# Altium PCB 2009_DFMUX_MEZZANINE_REV4_TIMEMAIL.PCBDOC (part 5 of 6)
Units mil, origin at the board's own origin, x right, y up, seen from the top; angles counter-clockwise.
Board outline 4922.86 x 3627.76 mil, 6 copper layers (Top Layer, Internal Plane 1, Mid-Layer 1, Internal Plane 2, Mid-Layer 2, Bottom Layer); 519 components, 606 nets, 2175 pads, 757 vias.
Unrouted connection lines stored in the file: 148.
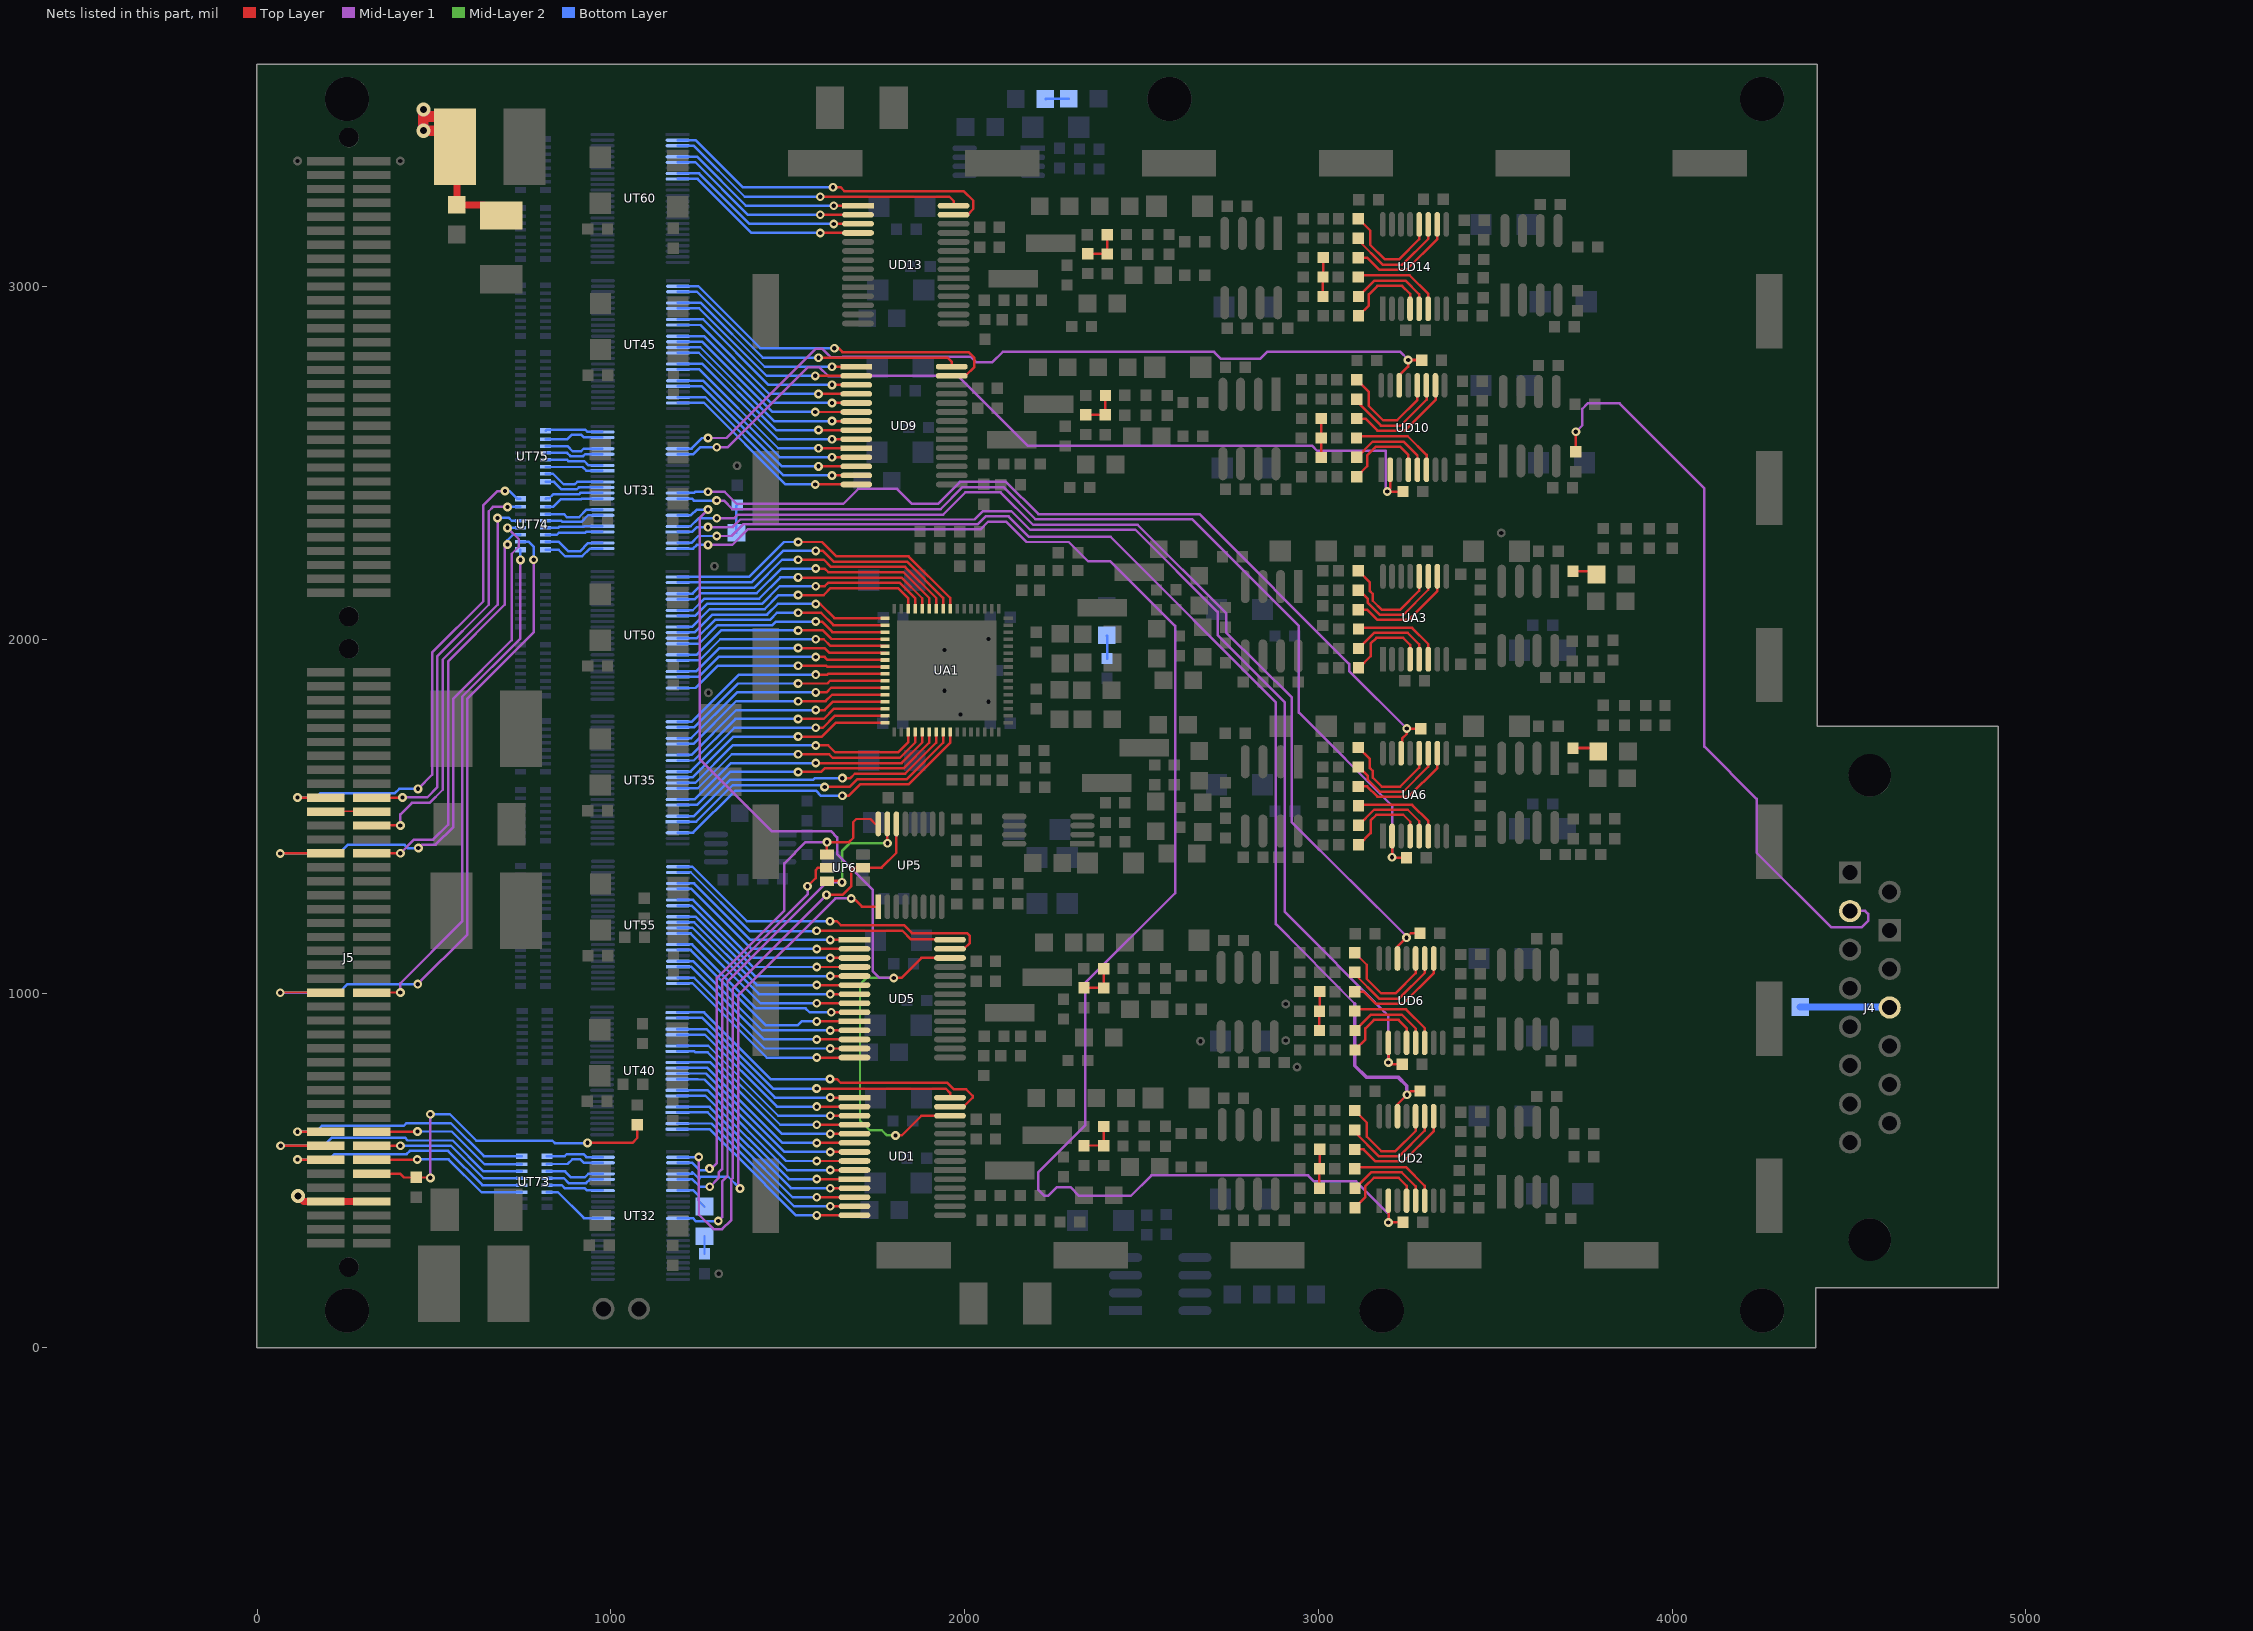
[diagram p9: the nets of this part, all layers, seen from the top]

## Via types
v1: diameter 25, hole 12, Top Layer to Bottom Layer, 692 vias
v2: diameter 40, hole 20, Top Layer to Bottom Layer, 39 vias
v3: diameter 35, hole 20, Top Layer to Bottom Layer, 23 vias
v4: diameter 22, hole 12, Top Layer to Bottom Layer, 3 vias

## Nets (pads, with @x,y where several pads share a name; then routed paths per layer and width w, separated by ;. In a path a pad name is that pad's centre, name@x,y a point inside that pad or via, vN(x,y) a via of type N, cw(c..) or ccw(c..) an arc to the next point about the centre after c; other vN are vias at no path point) (continued)
N867949: J5.19 UT74.16 | length 1439.7
  Top Layer w7: v1(114.33,1554.07) J5.19@194.63,1554.07
  Mid-Layer 1 w7: v1(454.63,1578.57) 494.63,1618.57 494.63,1964 639.63,2109 639.63,2381 679,2420.37 v1(700.63,2420.37)
  Bottom Layer w7: v1(114.33,1554.07) 166.13,1554.07 178.63,1566.57 389.63,1566.57 401.63,1578.57 v1(454.63,1578.57) ; v1(700.63,2420.37) 713.63,2420.37 735.63,2398.37 UT74.16@744.13,2398.37
N869068: J5.20 UT74.15 | length 1132.4
  Top Layer w7: J5.20@324.55,1554.07 410.93,1554.07 v1(410.63,1554.37)
  Mid-Layer 1 w7: v1(410.63,1554.37) 411.1,1554.83 481.1,1554.83 509.63,1583.37 509.63,1954 654.63,2099 654.63,2363.37 666.63,2375.37 v1(707.63,2375.37)
  Bottom Layer w7: v1(707.63,2375.37) UT74.15@744.13,2375.37
N870193: RA31.2 UA6.14 UT31.13 | length 2553
  Top Layer w7: UA6.14@3233.82,1679.68 3236.63,1682.5 3236.63,1721 3249.63,1734 v1(3249.63,1749) RA31.2@3288.63,1749
  Mid-Layer 1 w7: v1(1274.27,2418.37) 1321.27,2418.37 1355.63,2384 1656.86,2384 1699.27,2426.41 1809.27,2426.41 1851.68,2384 1924.36,2384 1986.77,2446.41 2116.77,2446.41 2208.18,2355 2663.63,2355 3086.63,1932 3086.63,1912 v1(3249.63,1749)
  Bottom Layer w7: UT31.13@1188.63,2414.97 1235.53,2414.97 1239.13,2418.37 v1(1274.27,2418.37)
N871887: RA55.2 UA6.2 UT31.14 | length 2821.3
  Top Layer w7: UA6.2@3208.23,1445.43 v1(3208.23,1385.4) 3209.63,1384 RA55.2@3248.63,1384
  Mid-Layer 1 w7: v1(1299,2393.37) 1319.27,2393.37 1343.63,2369 1931.86,2369 1994.27,2431.41 2109.27,2431.41 2199.68,2341 2643,2341 2945,2039.37 2945,1794 3208.63,1530 3208.63,1385.8 v1(3208.23,1385.4)
  Bottom Layer w7: UT31.14@1188.63,2399.27 1228.73,2399.27 1234.63,2393.37 v1(1299,2393.37)
N888717: UD1.26 UD5.26 UT31.17 | length 2741.6
  Top Layer w7: v1(1799.63,1044) 1821.27,1044 1877.9,1100.63 UD5.26@1959.03,1100.63 ; v1(1804.63,599) 1822.27,599 1877.9,654.63 UD1.26@1959.03,654.63
  Mid-Layer 1 w7: v1(1274.63,2368) 1250.63,2344 1250.63,1662.55 1454.27,1458.91 1621.77,1458.91 1639.27,1441.41 1639.27,1394.36 1739.63,1294 1739.63,1064 1759.27,1044 v1(1799.63,1044)
  Mid-Layer 2 w7: v1(1799.63,1044) 1722.25,1044 1704.13,1025.88 1704.13,640.5 1731.63,613.5 1765.5,613.5 1780,599 v1(1804.63,599)
  Bottom Layer w7: UT31.17@1188.63,2352.17 1226.3,2352.17 1242.93,2368 v1(1274.63,2368)
N890448: J5.24 UT74.13 | length 1160.3
  Top Layer w7: J5.24@324.55,1475.33 v1(404.85,1475.33)
  Mid-Layer 1 w7: v1(404.85,1475.33) 404.85,1506.22 437.63,1539 487.63,1539 524.63,1576 524.63,1944 679.63,2099 v1(679.63,2344.37)
  Bottom Layer w7: v1(679.63,2344.37) 711.63,2344.37 719.63,2336.37 UT74.13@744.13,2336.37
N891610: RD31.2 UD6.14 UT31.19 | length 2972.9
  Top Layer w7: UD6.14@3223.8,1099.02 3223.8,1133.17 v1(3248.63,1158) 3261.07,1170.43 RD31.2@3286.63,1170.43
  Mid-Layer 1 w7: v1(1299.27,2343.37) 1348,2343.37 1358.63,2354 1939.36,2354 2001.77,2416.41 2101.77,2416.41 2193.18,2325 2488.63,2325 2739.63,2074 2739.63,2019.37 2925,1836.37 2925,1484 3248.63,1162 v1(3248.63,1158)
  Bottom Layer w7: UT31.19@1188.63,2320.77 1225.4,2320.77 1248,2343.37 v1(1299.27,2343.37)
N892778: RD59.2 UD6.2 UT31.20 | length 3239
  Top Layer w7: v1(3197.63,805) v1@3198.23,804.4 ; UD6.2@3198.23,860.43 v1@3198.23,804.4 ; RD59.2@3236.63,800.43 3202.2,800.43 v1@3198.23,804.4
  Mid-Layer 1 w7: v1(1274.27,2318.37) 1344,2318.37 1365.63,2340 2027.86,2340 2051.77,2363.91 2131.77,2363.91 2184.68,2311 2482.63,2311 2715,2078.63 2715,2014 2905,1822.37 2905,1231 3197.63,936 3197.63,807 3196.63,806 v1(3197.63,805)
  Bottom Layer w7: UT31.20@1188.63,2305.07 1229.7,2305.07 1243,2318.37 v1(1274.27,2318.37)
N895125: RD1.2 UD2.14 UT31.22 | length 3382.3
  Top Layer w7: UD2.14@3223.8,653.02 3223.8,687.17 v1(3250.63,714) ; RD1.2@3286.63,724.43 3261.07,724.43 ; v1(3250.63,714) 3261.07,724.43 ; v1(3250.63,714) 3261.07,724.43
  Mid-Layer 1 w7: v1(1299.27,2293.37) 1341,2293.37 1373.63,2326 2036.36,2326 2059.27,2348.91 2124.27,2348.91 2182.18,2291 2413,2291 2880,1822.37 2880,1196.23 3102.63,971.23
  Mid-Layer 1 w10: 3102.63,971.23 3102.63,796.37 3135,764 3225,764 3250,739 3250,714.63 v1(3250.63,714)
  Bottom Layer w7: UT31.22@1188.63,2273.67 1227.53,2273.67 1246.83,2293.37 v1(1299.27,2293.37)
N896305: RD29.2 UD2.2 UT31.23 | length 4530.2
  Top Layer w7: v1(3197.63,353) 3198.03,352.6 v1@3198.23,352.6 ; UD2.2@3198.23,414.43 v1@3198.23,352.6 ; RD29.2@3238.63,355 3238.63,354 3199.63,354 v1@3198.23,352.6
  Mid-Layer 1 w7: v1(1274.27,2268.37) 1343,2268.37 1386.63,2312 2044.86,2312 2066.77,2333.91 2116.77,2333.91 2174.27,2276.41 2294.36,2276.41 2349.27,2221.5 2412.13,2221.5 2594.63,2039 2594.63,1283.63 2340.63,1029.63 2340.63,627 2207.63,494 2207.63,446 2225.63,428 2235.63,428 2260.63,453 2298.63,453 2323.63,428 2469.63,428 2527.63,486 2970.63,486 2987.63,469 3106.63,469 3198.63,377 3198.63,354 v1(3197.63,353)
  Bottom Layer w7: UT31.23@1188.63,2257.97 1232.6,2257.97 1243,2268.37 v1(1274.27,2268.37)
N906454: J5.27 UT74.12 | length 1628.9
  Top Layer w7: v1(65.55,1395.83) 66.32,1396.6 J5.27@194.63,1396.6
  Mid-Layer 1 w7: v1(455.73,1411.27) 455.9,1411.27 465.63,1421 504.63,1421 554.63,1471 554.63,1834 719.63,1999 719.63,2243.13 739.63,2262.93 739.63,2284.37 v1(707.63,2316.37)
  Bottom Layer w7: v1(65.55,1395.83) 231.2,1395.83 255.63,1420.27 416.63,1420.27 425.63,1411.27 v1(455.73,1411.27) ; v1(707.63,2316.37) UT74.12@744.13,2316.37
N908856: J5.28 UT74.11 | length 1165.1
  Top Layer w7: J5.28@324.55,1396.6 v1(404.85,1396.6)
  Mid-Layer 1 w7: v1(404.85,1396.6) 443.25,1435 497.63,1435 539.63,1477 539.63,1939 699.63,2099 699.63,2261.37 v1(707.63,2269.37)
  Bottom Layer w7: v1(707.63,2269.37) 707.63,2281.37 722.63,2296.37 UT74.11@744.13,2296.37
N958957: J5.47 UT74.10 | length 1943.7
  Top Layer w7: v1(65.55,1002.17) 66.32,1002.93 J5.47@194.63,1002.93
  Mid-Layer 1 w7: v1(453.87,1026.6) 594.63,1167.37 594.63,1834 781.63,2021 v1(781.63,2226.37)
  Bottom Layer w7: v1(65.55,1002.17) 231.2,1002.17 255.63,1026.6 v1(453.87,1026.6) ; UT74.10@744.13,2277.37 767.63,2277.37 781.63,2263.37 v1(781.63,2226.37)
N960349: J5.48 UT74.9 | length 1472.3
  Top Layer w7: J5.48@324.55,1002.93 v1(404.85,1002.93)
  Mid-Layer 1 w7: v1(404.85,1002.93) 404.85,1029.22 579.63,1204 579.63,1839 744.13,2003.5 v1(744.13,2225.87)
  Bottom Layer w7: v1(744.13,2225.87) UT74.9@744.13,2254.37
N995552: J5.74 RP1.1 RP4.1 | length 1012.3
  Top Layer w7: J5.74@324.55,491.17 403.47,491.17 414.63,480 449.63,480 488.63,480 v1(489.63,479) ; v1(933.63,578) 1060.63,578 1074.63,592 RP1.1@1074.63,629
  Mid-Layer 1 w7: v1(489.63,479) v1(489.63,659)
  Bottom Layer w7: v1(489.63,659) 544.63,659 619.63,584 834.63,584 841.63,577 932.63,577 v1(933.63,578)
N1002964: CP12.1 J5.77 J5.78 LP3.1 RP13.1 | length 738.8
  Top Layer w7: LP3.1@559.63,3394 LP3.1@564.63,3389 ; CP12.1@640.63,3229 671.63,3198 688.63,3198 CP12.1@689.63,3199
  Top Layer w10: LP3.1@514.63,3439 LP3.1@559.63,3394
  Top Layer w20: v2(115.7,427.82) 131.08,412.43 194.63,412.43 J5.78@324.55,412.43 ; LP3.1@564.63,3389 564.63,3229 CP12.1@640.63,3229
  Top Layer w30: v2(470,3499) 470,3479 ; LP3.1@514.63,3439 v2(470,3439) 470,3479 ; LP3.1@520,3479 470,3479
N1115828: UP5.15 UP6.6 UT32.13 | length 1573.1
  Top Layer w7: UP6.6@1610.67,1318.37 1649.63,1318.37 v1(1653.63,1314.37) ; UP5.15@1781.52,1480.05 1781.52,1424.48 1781.63,1424.37 v1(1781.63,1425)
  Mid-Layer 1 w7: v1(1303.63,357) 1314.63,368 1314.63,469 1329.63,484 1329.63,1034 1610.63,1315 1652.63,1315 1653.63,1314 v1(1653.63,1314.37)
  Mid-Layer 2 w7: v1(1653.63,1314.37) 1653.63,1403.27 1675.36,1425 v1(1781.63,1425)
  Bottom Layer w7: UT32.13@1189.63,364.97 1231.67,364.97 1239.63,357 v1(1303.63,357)
N1144411: UT32.36 UT73.6 | length 188.3
  Bottom Layer w7: UT73.6@819.13,438.37 850.27,438.37 923.67,364.97 UT32.36@977.03,364.97
N1162483: UT32.47 UT73.1 | length 163.7
  Bottom Layer w7: UT73.1@819.13,540.37 869.63,540.37 875.27,546 922.63,546 930.97,537.67 UT32.47@977.03,537.67
N1165605: UT32.46 UT73.2 | length 167.2
  Bottom Layer w7: UT73.2@819.13,517.37 877.63,518.37 890.63,531.37 913.63,531.37 923.03,521.97 UT32.46@977.03,521.97
N1167954: UT32.44 UT73.3 | length 169.2
  Bottom Layer w7: UT73.3@819.13,497.37 870.63,497.37 887.63,480.37 926,480.37 936.2,490.57 UT32.44@977.03,490.57
N1236272: CA46.2 RA13.2 | length 70.1
  Top Layer w7: RA13.2@3719.63,2194 3775.63,2194 CA46.2@3785.63,2184
N1241817: CA48.2 RA36.2 | length 75.1
  Top Layer w8: RA36.2@3719.63,1694 3780.63,1694 CA48.2@3790.63,1684
N1340990: J4.2 RD78.2 | length 2154.9
  Top Layer w7: RD78.2@3727.63,2531.43 v1(3727.63,2587.93)
  Mid-Layer 1 w7: v1(3727.63,2587.93) 3746.13,2606.43 3746.13,2652.93 3761.13,2667.93 3851.13,2667.93 4091.13,2427.93 4091.13,1697.93 4238.63,1550.43 4238.63,1397.93 4449,1187.57 4536.13,1187.57 4553.63,1205.07 4553.63,1225.07 4545.2,1233.5 J4.2@4502.5,1233.5
N1421104: RD61.2 UD10.14 UT31.5 | length 2397.7
  Top Layer w7: UD10.14@3228.8,2719.02 3226.63,2721.18 3226.63,2745.43 3253.63,2772.43 v1@3253.63,2790.43 ; v1@3253.63,2790.43 3291.63,2790.43 3291.07,2791 v1(3253.63,2791) v1@3253.63,2790.43
  Mid-Layer 1 w7: v1(1274.27,2570.37) 1327,2570.37 1579.63,2823 1596.63,2823 1620.63,2799 1654.63,2799 1655.63,2800 2016.63,2800 2031.63,2785 2078.63,2785 2107.63,2814 2705,2814 2725,2794 2835,2794 2855,2814 3231.63,2814 3252.63,2793 3252.63,2792 v1(3253.63,2791)
  Bottom Layer w7: UT31.5@1188.63,2540.57 1226.83,2540.57 1227.03,2540.37 1228,2540.37 1258,2570.37 v1(1274.27,2570.37)
N1428417: RD89.2 UD10.2 UT31.6 | length 2434.5
  Top Layer w7: UD10.2@3203.23,2480.43 3203.23,2427.6 v1(3194.63,2419) 3238.63,2419 3238.63,2420 RD89.2@3233.63,2420
  Mid-Layer 1 w7: v1(1299.27,2544.37) 1331,2544.37 1557.63,2771 1588.63,2771 1614.63,2745 1704.63,2745 1705.63,2746 1980.63,2746 2177.63,2549 2981.63,2549 2996.63,2534 3190.63,2534 3190.63,2423 v1(3194.63,2419)
  Bottom Layer w7: UT31.6@1188.63,2524.87 1233.1,2524.87 1253.1,2544.37 v1(1299.27,2544.37)
N2077430: DP1.2 RP8.1 | length 78.8
  Bottom Layer w7: DP1.2@1354.63,2303 1354.63,2379 RP8.1@1356.63,2381
N2078571: DP3.2 RP17.1 | length 67.4
  Bottom Layer w7: DP3.2@2228.63,3529 2228.63,3528 2229.63,3529 RP17.1@2294.63,3529
N2311501: UT32.43 UT73.4 | length 168
  Bottom Layer w7: UT73.4@819.13,478.37 866.63,478.37 880.63,464.37 930,464.37 940.5,474.87 UT32.43@977.03,474.87
N2314699: UT32.41 UT73.5 | length 164.1
  Bottom Layer w7: UT73.5@819.13,458.37 861,458.37 869.37,450 925.63,450 932.17,443.47 UT32.41@977.03,443.47
N2484141: J5.67 UT73.16 | length 763
  Top Layer w7: v1(114.33,609.27) J5.67@194.63,609.27
  Bottom Layer w7: v1(114.33,609.27) 166.13,609.27 182.63,626 414.58,626 422.53,633.77 547.37,633.77 640.77,540.37 UT73.16@748.13,540.37
N2488507: J5.68 UT73.15 | length 466.3
  Top Layer w7: J5.68@324.55,609.27 452.87,609.27 v1(453.63,610.03)
  Bottom Layer w7: v1@449.63,610.03 v1(453.63,610.03) 550.1,610.03 642.77,517.37 UT73.15@748.13,517.37
N2489600: J5.69 UT73.14 | length 858.9
  Top Layer w7: v1(66.55,569.9) J5.69@194.63,569.9
  Bottom Layer w7: v1(66.55,569.9) 188.77,569.9 212.2,593 417.63,593 425.63,584.57 553.07,584.57 640.27,497.37 UT73.14@748.13,497.37
N2492888: J5.71 UT73.12 | length 764.3
  Top Layer w7: v1(114.33,530.53) J5.71@194.63,530.53
  Bottom Layer w7: v1(114.33,530.53) 203.63,530.53 219.13,546 422.67,546 431.63,555.03 540.1,555.03 636.77,458.37 UT73.12@748.13,458.37
N2615723: J5.70 UT73.13 | length 464.2
  Top Layer w7: J5.70@324.55,569.9 v1(404.85,569.9) v1@406.17,569.9
  Bottom Layer w7: v1@403.85,568.9 v1(404.85,569.9) 547.73,569.9 639.27,478.37 UT73.13@748.13,478.37
N2902454: J5.72 UT73.11 | length 463
  Top Layer w7: J5.72@324.55,530.53 452.87,530.53 452.87,530.77 v1(452.63,531)
  Bottom Layer w7: v1(452.63,531) 452.93,531.3 541.33,531.3 634.27,438.37 UT73.11@748.13,438.37
N3312794: J4.12 RG1.2 | length 251.7
  Bottom Layer w20: RG1.2@4362,962 J4.12@4613.7,962
N3409536: J5.21 J5.22 | length 129.9
  Top Layer w4: J5.21@194.63,1514.7 J5.22@324.55,1514.7
N4032631: RA39.1 UA6.10 | length 311
  Top Layer w7: RA39.1@3112.63,1585.43 3137.63,1585.43 3166.63,1556.43 3254.63,1556.43 3336.18,1637.98 UA6.10@3336.18,1679.68
N4033590: RA26.2 UA3.6 | length 259.3
  Top Layer w7: RA26.2@3113.63,2030.43 3116.63,2033.43 3264.63,2033.43 3310.63,1987.43 UA3.6@3310.63,1945.43
N4033750: RA45.2 UA6.5 | length 244.6
  Top Layer w7: RA45.2@3113.63,1475.43 3157.63,1519.43 3252.63,1519.43 3285.03,1487.03 UA6.5@3285.03,1445.43
N4034511: RA14.1 UA3.10 | length 311
  Top Layer w7: RA14.1@3112.63,2085.43 3137.63,2085.43 3166.63,2056.43 3254.63,2056.43 3336.18,2137.98 UA3.10@3336.18,2179.68
N4034991: RA38.1 UA6.11 | length 301.1
  Top Layer w7: RA38.1@3112.63,1640.43 3114.63,1640.43 3139.63,1615.43 3139.63,1604.43 3173.63,1570.43 3239.63,1570.43 3310.58,1641.38 UA6.11@3310.58,1679.68
N4037191: RA16.1 UA3.11 | length 301.1
  Top Layer w7: RA16.1@3112.63,2140.43 3114.63,2140.43 3139.63,2115.43 3139.63,2104.43 3173.63,2070.43 3239.63,2070.43 3310.58,2141.38 UA3.11@3310.58,2179.68
N4040194: RA24.2 UA3.4 | length 250.5
  Top Layer w7: RA24.2@3113.63,1920.43 3114.63,1920.43 3147.63,1953.43 3147.63,1989.43 3163.63,2005.43 3239.63,2005.43 3259.43,1985.63 UA3.4@3259.43,1945.43
N4040195: RA25.2 UA3.5 | length 244.6
  Top Layer w7: RA25.2@3113.63,1975.43 3157.63,2019.43 3252.63,2019.43 3285.03,1987.03 UA3.5@3285.03,1945.43
N4040351: RA37.1 UA6.12 | length 307.5
  Top Layer w7: RA37.1@3112.63,1695.43 3145.63,1662.43 3145.63,1637.43 3153.63,1629.43 3153.63,1610.43 3179.63,1584.43 3230.63,1584.43 3285,1638.8 UA6.12@3285,1679.68
N4043354: RA50.2 UA6.4 | length 250.5
  Top Layer w7: RA50.2@3113.63,1420.43 3114.63,1420.43 3147.63,1453.43 3147.63,1489.43 3163.63,1505.43 3239.63,1505.43 3259.43,1485.63 UA6.4@3259.43,1445.43
N4043356: RA48.2 UA6.6 | length 259.3
  Top Layer w7: RA48.2@3113.63,1530.43 3116.63,1533.43 3264.63,1533.43 3310.63,1487.43 UA6.6@3310.63,1445.43
N5320690: RD114.2 UD14.6 | length 264
  Top Layer w7: RD114.2@3112.63,3025.43 3117.63,3030.43 3257.63,3030.43 3310.63,2977.43 UD14.6@3310.63,2935.43
N5320690_5462: RD84.2 UD10.6 | length 264
  Top Layer w7: RD84.2@3107.63,2570.43 3112.63,2575.43 3252.63,2575.43 3305.63,2522.43 UD10.6@3305.63,2480.43
N5320690_5910: RD54.2 UD6.6 | length 264
  Top Layer w7: RD54.2@3102.63,950.43 3107.63,955.43 3247.63,955.43 3300.63,902.43 UD6.6@3300.63,860.43
N5320690_6358: RD24.2 UD2.6 | length 264
  Top Layer w7: RD24.2@3102.63,504.43 3107.63,509.43 3247.63,509.43 3300.63,456.43 UD2.6@3300.63,414.43
N5321451: RD102.2 RD105.1 RD107.1 | length 110.4
  Top Layer w7: RD107.1@3012.63,2970.43 3012.63,3025.43 3013.63,3026.43 RD102.2@3013.63,3080.43
N5321451_5458: RD72.2 RD75.1 RD77.1 | length 110.4
  Top Layer w7: RD77.1@3007.63,2515.43 3007.63,2570.43 3008.63,2571.43 RD72.2@3008.63,2625.43
N5321451_5906: RD42.2 RD45.1 RD47.1 | length 110.4
  Top Layer w7: RD47.1@3002.63,895.43 3002.63,950.43 3003.63,951.43 RD42.2@3003.63,1005.43
N5321451_6354: RD12.2 RD15.1 RD17.1 | length 110.4
  Top Layer w7: RD17.1@3002.63,449.43 3002.63,504.43 3003.63,505.43 RD12.2@3003.63,559.43
N5321931: RD97.1 UD14.10 | length 314.5
  Top Layer w7: RD97.1@3112.63,3080.43 3137.63,3080.43 3171.63,3046.43 3249.63,3046.43 3336.13,3132.93 UD14.10@3336.13,3174.02
N5321931_5455: RD67.1 UD10.10 | length 314.5
  Top Layer w7: RD67.1@3107.63,2625.43 3132.63,2625.43 3166.63,2591.43 3244.63,2591.43 3331.13,2677.93 UD10.10@3331.13,2719.02
N5321931_5903: RD37.1 UD6.10 | length 314.5
  Top Layer w7: RD37.1@3102.63,1005.43 3127.63,1005.43 3161.63,971.43 3239.63,971.43 3326.13,1057.93 UD6.10@3326.13,1099.02
N5321931_6351: RD7.1 UD2.10 | length 314.5
  Top Layer w7: RD7.1@3102.63,559.43 3127.63,559.43 3161.63,525.43 3239.63,525.43 3326.13,611.93 UD2.10@3326.13,653.02
N5323010: RD100.2 RD101.1 RD106.1 | length 110
  Top Layer w7: RD100.2@2347.63,3091.43 RD106.1@2402.63,3091.43 ; RD106.1@2402.63,3090.43 RD106.1@2402.63,3091.43 ; RD101.1@2402.63,3145.43 RD106.1@2402.63,3091.43
N5323010_5461: RD70.2 RD71.1 RD76.1 | length 110
  Top Layer w7: RD70.2@2342.63,2636.43 RD76.1@2397.63,2636.43 ; RD76.1@2397.63,2635.43 RD76.1@2397.63,2636.43 ; RD71.1@2397.63,2690.43 RD76.1@2397.63,2636.43
N5323010_5909: RD40.2 RD41.1 RD46.1 | length 110
  Top Layer w7: RD40.2@2337.63,1016.43 RD46.1@2392.63,1016.43 ; RD46.1@2392.63,1015.43 RD46.1@2392.63,1016.43 ; RD41.1@2392.63,1070.43 RD46.1@2392.63,1016.43
N5323010_6357: RD10.2 RD11.1 RD16.1 | length 110
  Top Layer w7: RD10.2@2337.63,570.43 RD16.1@2392.63,570.43 ; RD16.1@2392.63,569.43 RD16.1@2392.63,570.43 ; RD11.1@2392.63,624.43 RD16.1@2392.63,570.43
N5323331: RD96.1 UD14.11 | length 303.4
  Top Layer w7: RD96.1@3112.63,3135.43 3112.63,3129.43 3181.63,3060.43 3237.63,3060.43 3310.55,3133.35 UD14.11@3310.55,3174.02
N5323331_5463: RD66.1 UD10.11 | length 303.4
  Top Layer w7: RD66.1@3107.63,2680.43 3107.63,2674.43 3176.63,2605.43 3232.63,2605.43 3305.55,2678.35 UD10.11@3305.55,2719.02
N5323331_5911: RD36.1 UD6.11 | length 303.4
  Top Layer w7: RD36.1@3102.63,1060.43 3102.63,1054.43 3171.63,985.43 3227.63,985.43 3300.55,1058.35 UD6.11@3300.55,1099.02
N5323331_6359: RD6.1 UD2.11 | length 303.4
  Top Layer w7: RD6.1@3102.63,614.43 3102.63,608.43 3171.63,539.43 3227.63,539.43 3300.55,612.35 UD2.11@3300.55,653.02
N5324691: RD95.1 UD14.12 | length 308.4
  Top Layer w7: RD95.1@3112.63,3190.43 3146.63,3156.43 3146.63,3116.43 3187.63,3075.43 3227.63,3075.43 3284.97,3132.77 UD14.12@3284.97,3174.02
N5324691_5459: RD65.1 UD10.12 | length 308.4
  Top Layer w7: RD65.1@3107.63,2735.43 3141.63,2701.43 3141.63,2661.43 3182.63,2620.43 3222.63,2620.43 3279.97,2677.77 UD10.12@3279.97,2719.02
N5324691_5907: RD35.1 UD6.12 | length 308.4
  Top Layer w7: RD35.1@3102.63,1115.43 3136.63,1081.43 3136.63,1041.43 3177.63,1000.43 3217.63,1000.43 3274.97,1057.77 UD6.12@3274.97,1099.02
N5324691_6355: RD5.1 UD2.12 | length 308.4
  Top Layer w7: RD5.1@3102.63,669.43 3136.63,635.43 3136.63,595.43 3177.63,554.43 3217.63,554.43 3274.97,611.77 UD2.12@3274.97,653.02
N5327690: RD113.2 UD14.4 | length 251.4
  Top Layer w7: RD113.2@3113.63,2915.43 3113.63,2916.43 3142.63,2945.43 3142.63,2976.43 3166.63,3000.43 3236.63,3000.43 3259.43,2977.63 UD14.4@3259.43,2935.43
N5327690_5457: RD83.2 UD10.4 | length 251.4
  Top Layer w7: RD83.2@3108.63,2460.43 3108.63,2461.43 3137.63,2490.43 3137.63,2521.43 3161.63,2545.43 3231.63,2545.43 3254.43,2522.63 UD10.4@3254.43,2480.43
N5327690_5905: RD53.2 UD6.4 | length 251.4
  Top Layer w7: RD53.2@3103.63,840.43 3103.63,841.43 3132.63,870.43 3132.63,901.43 3156.63,925.43 3226.63,925.43 3249.43,902.63 UD6.4@3249.43,860.43
N5327690_6353: RD23.2 UD2.4 | length 251.4
  Top Layer w7: RD23.2@3103.63,394.43 3103.63,395.43 3132.63,424.43 3132.63,455.43 3156.63,479.43 3226.63,479.43 3249.43,456.63 UD2.4@3249.43,414.43
N5329095: RD111.2 UD14.5 | length 247
  Top Layer w7: RD111.2@3113.63,2970.43 3158.63,3015.43 3245.63,3015.43 3285.03,2976.03 UD14.5@3285.03,2935.43
N5329095_5456: RD81.2 UD10.5 | length 247
  Top Layer w7: RD81.2@3108.63,2515.43 3153.63,2560.43 3240.63,2560.43 3280.03,2521.03 UD10.5@3280.03,2480.43
N5329095_5904: RD51.2 UD6.5 | length 247
  Top Layer w7: RD51.2@3103.63,895.43 3148.63,940.43 3235.63,940.43 3275.03,901.03 UD6.5@3275.03,860.43
N5329095_6352: RD21.2 UD2.5 | length 247
  Top Layer w7: RD21.2@3103.63,449.43 3148.63,494.43 3235.63,494.43 3275.03,455.03 UD2.5@3275.03,414.43
N5706160: DP2.2 RP12.1 | length 65.4
  Bottom Layer w7: DP2.2@2401.63,2012 2402.63,2011 RP12.1@2402.63,1947
N5982770: DP5.2 RP35.1 | length 49.4
  Bottom Layer w7: RP35.1@1264.63,264 DP5.2@1264.63,313.37
N40401912: RA15.1 UA3.12 | length 307.5
  Top Layer w7: RA15.1@3112.63,2195.43 3145.63,2162.43 3145.63,2137.43 3153.63,2129.43 3153.63,2110.43 3179.63,2084.43 3230.63,2084.43 3285,2138.8 UA3.12@3285,2179.68
N55995526: UT31.26 UT74.8 | length 177.6
  Bottom Layer w7: UT74.8@815.13,2254.37 852.27,2254.37 870.63,2236 918.63,2236 940.6,2257.97 UT31.26@976.03,2257.97
N55995527: UT31.27 UT74.7 | length 182
  Bottom Layer w7: UT74.7@815.13,2277.37 852.27,2277.37 879.63,2250 912.63,2250 935.63,2273 944.63,2273 945.3,2273.67 UT31.27@976.03,2273.67
N55995528: UT31.29 UT74.6 | length 164.5
  Bottom Layer w7: UT74.6@815.13,2296.37 847,2296.37 852.63,2302 918.63,2302 919.63,2303 927.63,2303 929.7,2305.07 UT31.29@976.03,2305.07
N55995529: UT31.30 UT74.5 | length 163
  Bottom Layer w7: UT74.5@815.13,2316.37 851.27,2316.37 853.63,2319 922.63,2319 924.63,2321 955.63,2321 955.87,2320.77 UT31.30@976.03,2320.77
N55995530: UT31.32 UT74.4 | length 170.2
  Bottom Layer w7: UT74.4@815.13,2336.37 860,2336.37 863.37,2333 916.63,2333 935.63,2352 975.87,2352 UT31.32@976.03,2352.17
N55995531: UT31.33 UT74.3 | length 173
  Bottom Layer w7: UT74.3@815.13,2355.37 867,2355.37 875.37,2347 910.63,2347 931.5,2367.87 UT31.33@976.03,2367.87
N55995532: UT31.35 UT74.2 | length 171
  Bottom Layer w7: UT74.2@815.13,2375.37 836,2375.37 857.63,2397 915.63,2397 917.63,2399 927.63,2399 927.63,2399.27 UT31.35@976.03,2399.27
N55995533: UT31.36 UT74.1 | length 167.8
  Bottom Layer w7: UT74.1@815.13,2398.37 816.77,2400 825.63,2400 836.63,2411 909.63,2411 913.6,2414.97 UT31.36@976.03,2414.97
N55995534: UT31.37 UT75.8 | length 172.1
  Bottom Layer w7: UT75.8@815.13,2446.37 839.27,2446.37 860.63,2425 903.63,2425 909.3,2430.67 UT31.37@976.03,2430.67
N55995535: UT31.38 UT75.7 | length 176.5
  Bottom Layer w7: UT75.7@815.13,2469.37 836.27,2469.37 866.63,2439 897.63,2439 905,2446.37 UT31.38@976.03,2446.37
N55995536: UT31.40 UT75.6 | length 165.3
  Bottom Layer w7: UT75.6@815.13,2488.37 920.27,2488.37 930.87,2477.77 UT31.40@976.03,2477.77
N55995537: UT31.41 UT75.5 | length 167.7
  Bottom Layer w7: UT75.5@815.13,2508.37 876.27,2508.37 879.63,2505 924.63,2505 936.63,2493 936.63,2493.47 UT31.41@976.03,2493.47
N55995538: UT31.43 UT75.4 | length 167.2
  Bottom Layer w7: UT75.4@815.13,2528.37 876.27,2528.37 885.63,2519 921.63,2519 927.5,2524.87 UT31.43@976.03,2524.87
N55995539: UT31.44 UT75.3 | length 170
  Bottom Layer w7: UT75.3@815.13,2547.37 877.27,2547.37 891.63,2533 915.63,2533 923.2,2540.57 UT31.44@976.03,2540.57
N55995540: UT31.46 UT75.2 | length 169.5
  Bottom Layer w7: UT75.2@815.13,2567.37 877,2567.37 889.63,2580 915.63,2580 923.67,2571.97 UT31.46@976.03,2571.97
N55995545: UT31.47 UT75.1 | length 164.8
  Bottom Layer w7: UT75.1@815.13,2590.37 819.13,2594 927.35,2594 933.97,2587.67 UT31.47@976.03,2587.67
POWER_DATA0: UP5.14 UP6.2 UT32.2 | length 1725.8
  Top Layer w7: v1(1609.63,1279) 1654.63,1279 1679.63,1304 1679.63,1347.07 1688.43,1355.87 1712.63,1355.87 1765.13,1355.87 1807.12,1397.85 UP5.14@1807.12,1480.05
  Mid-Layer 1 w7: v1(1248.3,537.67) 1248.3,375.33 1289.63,334 1314.63,334 1339.63,359 1339.63,474 1344.63,479 1344.63,1014 v1(1609.63,1279)
  Bottom Layer w7: UT32.2@1189.63,537.67 v1(1248.3,537.67)
POWER_DATA1: UP5.16 UP6.4 UT32.3 | length 1446.2
  Top Layer w7: UP6.4@1610.63,1393.37 v1(1610.63,1428) 1673.13,1428 1685.07,1439.93 1685.07,1484.8 1693.63,1493.37 1733.63,1493.37 1746.95,1480.05 UP5.16@1755.93,1480.05
  Mid-Layer 1 w7: v1(1278.63,505) 1278.63,500 1299.63,521 1299.63,1044 1490.63,1235 1490.63,1368 1550.63,1428 v1(1610.63,1428)
  Bottom Layer w7: UT32.3@1189.63,521.97 1229.67,521.97 1250.63,501 1278.63,501 v1(1278.63,505)
POWER_DATA2: UP5.1 UT32.5 | length 1270.2
  Top Layer w7: v1(1679.63,1269) 1684.63,1264 1691.63,1264 1709.63,1246 1709.63,1245.8 UP5.1@1755.93,1245.8
  Mid-Layer 1 w7: v1(1364.63,449) 1359.63,454 1359.63,994 1634.63,1269 v1(1679.63,1269)
  Bottom Layer w7: UT32.5@1189.63,490.57 1230.03,490.57 1230.03,495.37 1248.4,477 1249.63,477 1254.63,482 1331.63,482 v1(1364.63,449)
POWER_DATA3: UP6.5 UT32.6 | length 1152
  Top Layer w7: v1(1555.93,1303.3) 1578.43,1325.8 1578.43,1348.3 1585.9,1355.77 UP6.5@1610.63,1355.77
  Mid-Layer 1 w7: v1(1279.63,454) 1304.63,479 1304.63,494 1314.63,504 1314.63,1039 1555.93,1280.3 v1(1555.93,1303.3)
  Bottom Layer w7: UT32.6@1189.63,474.87 1230.53,474.87 1251.4,454 v1(1279.63,454)
POWER_DATA4: DP5.1 UT32.8 | length 102.7
  Bottom Layer w7: UT32.8@1189.63,443.47 1233.17,443.47 1247.63,429 1247.63,414.37 DP5.1@1264.63,397.37
RECA_DATA0: UA1.41 UT35.2 | length 642.3
  Top Layer w7: v1(1579.27,1901.41) 1611.77,1901.41 1614.16,1903.8 UA1.41@1774.92,1903.8
  Bottom Layer w7: UT35.2@1188.63,1768.67 1229.03,1768.67 1361.77,1901.41 v1(1579.27,1901.41)
RECA_DATA1: UA1.42 UT35.3 | length 640.6
  Top Layer w7: v1(1529.27,1876.41) 1611.77,1876.41 1619.47,1884.11 UA1.42@1774.92,1884.11
  Bottom Layer w7: UT35.3@1188.63,1752.97 1235.83,1752.97 1359.27,1876.41 v1(1529.27,1876.41)
RECA_DATA2: UA1.43 UT35.5 | length 645.5
  Top Layer w7: v1(1579.27,1851.41) 1609.27,1851.41 1622.29,1864.43 UA1.43@1774.92,1864.43
  Bottom Layer w7: UT35.5@1188.63,1721.57 1226.93,1721.57 1356.77,1851.41 v1(1579.27,1851.41)
RECA_DATA3: UA1.44 UT35.6 | length 643.8
  Top Layer w7: v1(1529.27,1826.41) 1606.77,1826.41 1625.1,1844.74 UA1.44@1774.92,1844.74
  Bottom Layer w7: UT35.6@1188.63,1705.87 1233.73,1705.87 1354.27,1826.41 v1(1529.27,1826.41)
RECA_DATA4: UA1.45 UT35.8 | length 648.7
  Top Layer w7: v1(1579.27,1801.41) 1604.27,1801.41 1627.92,1825.06 UA1.45@1774.92,1825.06
  Bottom Layer w7: UT35.8@1188.63,1674.47 1227.33,1674.47 1354.27,1801.41 v1(1579.27,1801.41)
RECA_DATA5: UA1.46 UT35.9 | length 647
  Top Layer w7: v1(1529.27,1776.41) 1601.77,1776.41 1630.73,1805.37 UA1.46@1774.92,1805.37
  Bottom Layer w7: UT35.9@1188.63,1658.77 1234.13,1658.77 1351.77,1776.41 v1(1529.27,1776.41)
RECA_DATA6: UA1.47 UT35.11 | length 651.9
  Top Layer w7: v1(1579.27,1751.41) 1599.27,1751.41 1633.55,1785.69 UA1.47@1774.92,1785.69
  Bottom Layer w7: UT35.11@1188.63,1627.37 1225.23,1627.37 1349.27,1751.41 v1(1579.27,1751.41)
RECA_DATA7: UA1.48 UT35.12 | length 650.2
  Top Layer w7: v1(1529.27,1726.41) 1596.77,1726.41 1636.36,1766 UA1.48@1774.92,1766
  Bottom Layer w7: UT35.12@1188.63,1611.67 1232.03,1611.67 1346.77,1726.41 v1(1529.27,1726.41)
RECA_DATA8: UA1.51 UT35.13 | length 745.2
  Top Layer w7: v1(1579.27,1701.41) 1614.27,1701.41 1634.27,1681.41 1811.77,1681.41 1840.87,1710.51 UA1.51@1840.87,1739.43
  Bottom Layer w7: UT35.13@1188.63,1595.97 1238.83,1595.97 1344.27,1701.41 v1(1579.27,1701.41)
RECA_DATA9: UA1.52 UT35.14 | length 763.3
  Top Layer w7: v1(1529.27,1676.41) 1616.77,1676.41 1626.77,1666.41 1816.77,1666.41 1860.55,1710.19 UA1.52@1860.55,1739.43
  Bottom Layer w7: UT35.14@1188.63,1580.27 1245.63,1580.27 1341.77,1676.41 v1(1529.27,1676.41)
RECA_DATA10: UA1.53 UT35.16 | length 787.8
  Top Layer w7: v1(1579.27,1651.41) 1821.77,1651.41 1880.24,1709.88 UA1.53@1880.24,1739.43
  Bottom Layer w7: UT35.16@1188.63,1548.87 1236.73,1548.87 1339.27,1651.41 v1(1579.27,1651.41)
RECA_DATA11: UA1.54 UT35.17 | length 814.2
  Top Layer w7: v1(1529.27,1626.41) 1594.27,1626.41 1604.27,1636.41 1826.77,1636.41 1899.92,1709.56 UA1.54@1899.92,1739.43
  Bottom Layer w7: UT35.17@1188.63,1533.17 1243.53,1533.17 1336.77,1626.41 v1(1529.27,1626.41)
RECA_DATA12: UA1.55 UT35.19 | length 847.1
  Top Layer w7: v1(1654.27,1608.91) 1676.77,1608.91 1689.27,1621.41 1831.77,1621.41 1919.61,1709.25 UA1.55@1919.61,1739.43
  Bottom Layer w7: UT35.19@1188.63,1501.77 1234.63,1501.77 1336.77,1603.91 1571.77,1603.91 1576.77,1608.91 v1(1654.27,1608.91)
RECA_DATA13: UA1.56 UT35.20 | length 876.7
  Top Layer w7: v1(1604.27,1583.91) 1674.27,1583.91 1696.77,1606.41 1836.77,1606.41 1939.29,1708.93 UA1.56@1939.29,1739.43
  Bottom Layer w7: UT35.20@1188.63,1486.07 1241.43,1486.07 1344.27,1588.91 1594.27,1588.91 v1(1604.27,1583.91)
RECA_DATA14: UA1.57 UT35.22 | length 918.8
  Top Layer w7: v1(1654.27,1558.91) 1671.77,1558.91 1704.27,1591.41 1841.77,1591.41 1958.98,1708.62 UA1.57@1958.98,1739.43
  Bottom Layer w7: UT35.22@1188.63,1454.67 1232.53,1454.67 1351.77,1573.91 1579.27,1573.91 1594.27,1558.91 v1(1654.27,1558.91)
RECB_DATA0: UA1.24 UT50.2 | length 907.4
  Top Layer w7: v1(1529.27,2276.41) 1596.77,2276.41 1637.31,2235.87 1841.77,2235.87 1958.98,2118.66 UA1.24@1958.98,2087.85
  Bottom Layer w7: UT50.2@1188.63,2177.67 1390.53,2177.67 1489.27,2276.41 v1(1529.27,2276.41)
RECB_DATA1: UA1.25 UT50.3 | length 873.3
  Top Layer w7: v1(1579.27,2251.41) 1599.27,2251.41 1629.81,2220.87 1836.77,2220.87 1939.29,2118.34 UA1.25@1939.29,2087.85
  Bottom Layer w7: UT50.3@1188.63,2161.97 1397.33,2161.97 1486.77,2251.41 v1(1579.27,2251.41)
RECB_DATA2: UA1.26 UT50.5 | length 845.7
  Top Layer w7: v1(1529.27,2226.41) 1601.77,2226.41 1622.31,2205.87 1831.77,2205.87 1919.61,2118.03 UA1.26@1919.61,2087.85
  Bottom Layer w7: UT50.5@1188.63,2130.57 1230.93,2130.57 1246.77,2146.41 1404.27,2146.41 1484.27,2226.41 v1(1529.27,2226.41)
RECB_DATA3: UA1.27 UT50.6 | length 811.7
  Top Layer w7: v1(1579.27,2201.41) 1604.27,2201.41 1614.81,2190.87 1826.77,2190.87 1899.92,2117.71 UA1.27@1899.92,2087.85
  Bottom Layer w7: UT50.6@1188.63,2114.87 1237.73,2114.87 1254.27,2131.41 1411.77,2131.41 1481.77,2201.41 v1(1579.27,2201.41)
RECB_DATA4: UA1.28 UT50.8 | length 783.3
  Top Layer w7: v1@1529.81,2175.87 1821.77,2175.87 1880.24,2117.4 UA1.28@1880.24,2087.85
  Bottom Layer w7: UT50.8@1188.63,2083.47 1231.33,2083.47 1264.27,2116.41 1419.27,2116.41 1479.27,2176.41 v1(1529.27,2176.41)
RECB_DATA5: UA1.29 UT50.9 | length 757.9
  Top Layer w7: v1(1579.27,2151.41) 1604.27,2151.41 1613.73,2160.87 1816.77,2160.87 1860.55,2117.08 UA1.29@1860.55,2087.85
  Bottom Layer w7: UT50.9@1188.63,2067.77 1238.13,2067.77 1271.77,2101.41 1426.77,2101.41 1476.77,2151.41 v1(1579.27,2151.41)
RECB_DATA6: UA1.30 UT50.11 | length 738.6
  Top Layer w7: v1(1529.27,2126.41) 1601.77,2126.41 1621.23,2145.87 1811.77,2145.87 1840.87,2116.77 UA1.30@1840.87,2087.85
  Bottom Layer w7: UT50.11@1188.63,2036.37 1229.23,2036.37 1279.27,2086.41 1434.27,2086.41 1474.27,2126.41 v1(1529.27,2126.41)
RECB_DATA7: UA1.33 UT50.12 | length 636.4
  Top Layer w7: v1(1579.27,2101.41) 1591.77,2101.41 1631.9,2061.28 UA1.33@1774.92,2061.28
  Bottom Layer w7: UT50.12@1188.63,2020.67 1236.03,2020.67 1286.77,2071.41 1441.77,2071.41 1471.77,2101.41 v1(1579.27,2101.41)
RECB_DATA8: UA1.34 UT50.13 | length 630.3
  Top Layer w7: v1(1529.27,2076.41) 1594.27,2076.41 1629.09,2041.59 UA1.34@1774.92,2041.59
  Bottom Layer w7: UT50.13@1188.63,2004.97 1242.83,2004.97 1294.27,2056.41 1449.27,2056.41 1469.27,2076.41 v1(1529.27,2076.41)
RECB_DATA9: UA1.35 UT50.14 | length 624.3
  Top Layer w7: v1(1579.27,2051.41) 1596.77,2051.41 1626.27,2021.91 UA1.35@1774.92,2021.91
  Bottom Layer w7: UT50.14@1188.63,1989.27 1249.63,1989.27 1301.77,2041.41 1456.77,2041.41 1466.77,2051.41 v1(1579.27,2051.41)
RECB_DATA10: UA1.36 UT50.16 | length 624.7
  Top Layer w7: v1(1529.27,2026.41) 1599.27,2026.41 1623.46,2002.22 UA1.36@1774.92,2002.22
  Bottom Layer w7: UT50.16@1188.63,1957.87 1243.23,1957.87 1311.77,2026.41 v1(1529.27,2026.41)
RECB_DATA11: UA1.37 UT50.17 | length 618.6
  Top Layer w7: v1(1579.27,2001.41) 1601.77,2001.41 1620.64,1982.54 UA1.37@1774.92,1982.54
  Bottom Layer w7: UT50.17@1188.63,1942.17 1250.03,1942.17 1309.27,2001.41 v1(1579.27,2001.41)
RECB_DATA12: UA1.38 UT50.19 | length 619.1
  Top Layer w7: v1(1529.27,1976.41) 1604.27,1976.41 1617.83,1962.85 UA1.38@1774.92,1962.85
  Bottom Layer w7: UT50.19@1188.63,1910.77 1241.13,1910.77 1306.77,1976.41 v1(1529.27,1976.41)
RECB_DATA13: UA1.39 UT50.20 | length 613
  Top Layer w7: v1(1579.27,1951.41) 1604.27,1951.41 1612.51,1943.17 UA1.39@1774.92,1943.17
  Bottom Layer w7: UT50.20@1188.63,1895.07 1247.93,1895.07 1304.27,1951.41 v1(1579.27,1951.41)
RECB_DATA14: UA1.40 UT50.22 | length 613.5
  Top Layer w7: v1(1529.27,1926.41) 1609.27,1926.41 1612.2,1923.48 UA1.40@1774.92,1923.48
  Bottom Layer w7: UT50.22@1188.63,1863.67 1239.03,1863.67 1301.77,1926.41 v1(1529.27,1926.41)
TRAN1_DATA0: UD1.27 UT40.2 | length 1012.3
  Top Layer w7: v1(1619.63,758.37) 1638.63,758.37 1649.63,747.37 1951.27,747.37 1969.63,729 2004.63,729 2022.63,711 2022.63,705.37 1997.5,680.23 UD1.27@1959.03,680.23
  Bottom Layer w7: UT40.2@1187.63,946.67 1263.3,946.67 1451.6,758.37 v1(1619.63,758.37)
TRAN1_DATA1: UD1.28 UT40.3 | length 872.3
  Top Layer w7: v1(1581.63,731.37) 1946.63,731.37 1959.03,718.97 UD1.28@1959.03,705.83
  Bottom Layer w7: UT40.3@1187.63,930.97 1258.67,930.97 1458.27,731.37 v1(1581.63,731.37)
TRAN1_DATA2: UD1.1 UT40.5 | length 581.6
  Top Layer w7: v1(1620.1,705.83) UD1.1@1689.03,705.83
  Bottom Layer w7: UT40.5@1187.63,899.57 1225.83,899.57 1226.03,899.37 1270.27,899.37 1463.8,705.83 v1(1620.1,705.83)
TRAN1_DATA3: UD1.2 UT40.6 | length 585.6
  Top Layer w7: v1(1581.77,680.23) UD1.2@1689.03,680.23
  Bottom Layer w7: UT40.6@1187.63,883.87 1265.27,883.87 1469.4,680.23 v1(1581.77,680.23)
TRAN1_DATA4: UD1.3 UT40.8 | length 583.4
  Top Layer w7: v1(1620.1,654.63) UD1.3@1689.03,654.63
  Bottom Layer w7: UT40.8@1187.63,852.47 1275.27,852.47 1473,654.63 v1(1620.1,654.63)
TRAN1_DATA5: UD1.4 UT40.9 | length 590.1
  Top Layer w7: v1(1581.77,629.03) 1689.03,629.03 UD1.4@1687.03,627.17
  Bottom Layer w7: UT40.9@1187.63,836.77 1235.43,836.77 1238.03,834 1273.27,834 1478.6,629.03 v1(1581.77,629.03)
TRAN1_DATA6: UD1.5 UT40.11 | length 585
  Top Layer w7: v1(1620.1,603.43) UD1.5@1689.03,603.43
  Bottom Layer w7: UT40.11@1187.63,805.37 1281.27,805.37 1483.2,603.43 v1(1620.1,603.43)
TRAN1_DATA7: UD1.6 UT40.12 | length 589.1
  Top Layer w7: v1(1581.77,577.83) UD1.6@1689.03,577.83
  Bottom Layer w7: UT40.12@1187.63,789.67 1272.97,789.67 1484.63,578 1581.6,578 v1(1581.77,577.83)
TRAN1_DATA8: UD1.7 UT40.13 | length 593.2
  Top Layer w7: v1(1620.1,552.23) UD1.7@1689.03,552.23
  Bottom Layer w7: UT40.13@1187.63,773.97 1268.67,773.97 1490.4,552.23 v1(1620.1,552.23)
TRAN1_DATA9: UD1.8 UT40.14 | length 597.4
  Top Layer w7: v1(1581.77,526.63) UD1.8@1689.03,526.63
  Bottom Layer w7: UT40.14@1187.63,758.27 1245.03,758.27 1245.93,757 1264.27,757 1495,526.63 v1(1581.77,526.63)
TRAN1_DATA10: UD1.9 UT40.16 | length 594.9
  Top Layer w7: v1(1620.1,501.03) UD1.9@1689.03,501.03
  Bottom Layer w7: UT40.16@1187.63,726.87 1272.77,726.87 1498.6,501.03 v1(1620.1,501.03)
TRAN1_DATA11: UD1.10 UT40.17 | length 599
  Top Layer w7: v1(1581.77,475.43) UD1.10@1689.03,475.43
  Bottom Layer w7: UT40.17@1187.63,711.17 1267.47,711.17 1503.2,475.43 v1(1581.77,475.43)
TRAN1_DATA12: UD1.11 UT40.19 | length 596.6
  Top Layer w7: v1(1620.1,449.83) UD1.11@1689.03,449.83
  Bottom Layer w7: UT40.19@1187.63,679.77 1278.87,679.77 1508.8,449.83 v1(1620.1,449.83)
TRAN1_DATA13: UD1.12 UT40.20 | length 600.7
  Top Layer w7: v1(1581.77,424.23) UD1.12@1689.03,424.23
  Bottom Layer w7: UT40.20@1187.63,664.07 1273.85,664.07 1357.55,580 ; 1357.57,580 1513.7,424.23 v1(1581.77,424.23)
TRAN1_DATA14: UD1.13 UT40.22 | length 598.3
  Top Layer w7: v1(1620.1,398.63) UD1.13@1689.03,398.63
  Bottom Layer w7: UT40.22@1187.63,632.67 1283.97,632.67 1518,398.63 v1(1620.1,398.63)
TRAN1_DATA15: UD1.14 UT40.23 | length 602.5
  Top Layer w7: v1(1581.77,373.03) UD1.14@1689.03,373.03
  Bottom Layer w7: UT40.23@1187.63,616.97 1278.92,616.97 1346.52,549 1347.63,549 1523.6,373.03 v1(1581.77,373.03)
TRAN2_DATA0: UD5.27 UT55.2 | length 988.4
  Top Layer w7: v1(1619.63,1204.37) 1638.63,1204.37 1649.63,1193.37 1828.27,1193.37 1850.63,1171 2006.63,1171 2014.63,1163 2014.63,1143.37 1997.5,1126.23 UD5.27@1959.03,1126.23
  Bottom Layer w7: UT55.2@1189.63,1358.67 1229.97,1358.67 1384.27,1204.37 v1(1619.63,1204.37)
TRAN2_DATA1: UD5.28 UT55.3 | length 849.5
  Top Layer w7: v1(1581.63,1177.37) 1824.27,1177.37 1848.63,1153 1952.43,1153 1953.27,1151.83 UD5.28@1959.03,1151.83
  Bottom Layer w7: UT55.3@1189.63,1342.97 1225.67,1342.97 1392.27,1176.37 1580.63,1176.37 v1(1581.63,1177.37)
TRAN2_DATA2: UD5.1 UT55.5 | length 565.6
  Top Layer w7: v1(1620.1,1151.83) UD5.1@1689.03,1151.83
  Bottom Layer w7: UT55.5@1189.63,1311.57 1227.83,1311.57 1228.03,1311.37 1235.03,1311.37 1394.57,1151.83 v1(1620.1,1151.83)
TRAN2_DATA3: UD5.2 UT55.6 | length 569.7
  Top Layer w7: v1(1581.77,1126.23) UD5.2@1689.03,1126.23
  Bottom Layer w7: UT55.6@1189.63,1295.87 1227.77,1295.87 1397.4,1126.23 v1(1581.77,1126.23)
TRAN2_DATA4: UD5.3 UT55.8 | length 567.3
  Top Layer w7: v1(1620.1,1100.63) UD5.3@1689.03,1100.63
  Bottom Layer w7: UT55.8@1189.63,1264.47 1232.17,1264.47 1396,1100.63 v1(1620.1,1100.63)
TRAN2_DATA5: UD5.4 UT55.9 | length 574.1
  Top Layer w7: v1(1581.77,1075.03) 1689.03,1075.03 UD5.4@1687.03,1073.17
  Bottom Layer w7: UT55.9@1189.63,1248.77 1227.87,1248.77 1401.6,1075.03 v1(1581.77,1075.03)
TRAN2_DATA6: UD5.5 UT55.11 | length 569
  Top Layer w7: v1(1620.1,1049.43) UD5.5@1689.03,1049.43
  Bottom Layer w7: UT55.11@1189.63,1217.37 1239.27,1217.37 1407.2,1049.43 v1(1620.1,1049.43)
TRAN2_DATA7: UD5.6 UT55.12 | length 573.1
  Top Layer w7: v1(1581.77,1023.83) UD5.6@1689.03,1023.83
  Bottom Layer w7: UT55.12@1189.63,1201.67 1234.97,1201.67 1412.8,1023.83 v1(1581.77,1023.83)
TRAN2_DATA8: UD5.7 UT55.13 | length 577.2
  Top Layer w7: v1(1620.1,998.23) UD5.7@1689.03,998.23
  Bottom Layer w7: UT55.13@1189.63,1185.97 1230.67,1185.97 1418.4,998.23 v1(1620.1,998.23)
TRAN2_DATA9: UD5.8 UT55.14 | length 581.3
  Top Layer w7: v1(1581.77,972.63) UD5.8@1689.03,972.63
  Bottom Layer w7: UT55.14@1189.63,1170.27 1225.37,1170.27 1423,972.63 v1(1581.77,972.63)
TRAN2_DATA10: UD5.9 UT55.16 | length 578.9
  Top Layer w7: v1(1622.97,947.03) UD5.9@1689.03,947.03
  Bottom Layer w7: UT55.16@1189.63,1138.87 1229.77,1138.87 1410.63,958 1550.63,958 1561.6,947.03 v1(1622.97,947.03)
TRAN2_DATA11: UD5.10 UT55.17 | length 592.4
  Top Layer w7: v1(1581.77,921.43) UD5.10@1689.03,921.43
  Bottom Layer w7: UT55.17@1189.63,1123.17 1225.47,1123.17 1438.63,910 1527.63,910 1539.07,921.43 v1(1581.77,921.43)
TRAN2_DATA12: UD5.11 UT55.19 | length 580.6
  Top Layer w7: v1(1620.1,895.83) UD5.11@1689.03,895.83
  Bottom Layer w7: UT55.19@1189.63,1091.77 1231.87,1091.77 1427.8,895.83 v1(1620.1,895.83)
TRAN2_DATA13: UD5.12 UT55.20 | length 584.7
  Top Layer w7: v1(1581.77,870.23) UD5.12@1689.03,870.23
  Bottom Layer w7: UT55.20@1189.63,1076.07 1226.57,1076.07 1432.4,870.23 v1(1581.77,870.23)
TRAN2_DATA14: UD5.13 UT55.22 | length 582.3
  Top Layer w7: v1(1620.1,844.63) UD5.13@1689.03,844.63
  Bottom Layer w7: UT55.22@1189.63,1044.67 1234.97,1044.67 1435,844.63 v1(1620.1,844.63)
TRAN2_DATA15: UD5.14 UT55.23 | length 586.4
  Top Layer w7: v1(1581.77,819.03) UD5.14@1689.03,819.03
  Bottom Layer w7: UT55.23@1189.63,1028.97 1230.67,1028.97 1440.6,819.03 v1(1581.77,819.03)
TRAN3_DATA0: UD9.27 UT45.2 | length 1022.3
  Top Layer w7: v1(1631.63,2824) 1631.27,2824.37 1643.63,2824.37 1654.63,2813.37 2010.63,2813.37 2027.63,2796.37 2027.63,2771.37 2002.5,2746.23 UD9.27@1964.03,2746.23
  Bottom Layer w7: UT45.2@1189.63,2999.67 1246.97,2999.67 1422.27,2824.37 1631.27,2824.37 v1(1631.63,2824)
TRAN3_DATA1: UD9.28 UT45.3 | length 870
  Top Layer w7: v1(1586.63,2797.37) 1951.63,2797.37 1964.03,2784.97 UD9.28@1964.03,2771.83
  Bottom Layer w7: UT45.3@1189.63,2983.97 1242.67,2983.97 1429.27,2797.37 v1(1586.63,2797.37)
TRAN3_DATA2: UD9.1 UT45.5 | length 579.3
  Top Layer w7: v1(1625.1,2771.83) UD9.1@1694.03,2771.83
  Bottom Layer w7: UT45.5@1189.63,2952.57 1227.83,2952.57 1228.03,2952.37 1254.27,2952.37 1434.8,2771.83 v1(1625.1,2771.83)
TRAN3_DATA3: UD9.2 UT45.6 | length 583.6
  Top Layer w7: v1(1577.63,2746) 1577.87,2746.23 UD9.2@1694.03,2746.23
  Bottom Layer w7: UT45.6@1189.63,2936.87 1249.77,2936.87 1440.4,2746.23 1577.4,2746.23 v1(1577.63,2746)
TRAN3_DATA4: UD9.3 UT45.8 | length 581
  Top Layer w7: v1(1625.1,2720.63) UD9.3@1694.03,2720.63
  Bottom Layer w7: UT45.8@1189.63,2905.47 1261.17,2905.47 1446,2720.63 v1(1625.1,2720.63)
TRAN3_DATA5: UD9.4 UT45.9 | length 587.8
  Top Layer w7: v1(1586.77,2695.03) 1694.03,2695.03 UD9.4@1692.03,2693.17
  Bottom Layer w7: UT45.9@1189.63,2889.77 1252.87,2889.77 1447.6,2695.03 v1(1586.77,2695.03)
TRAN3_DATA6: UD9.5 UT45.11 | length 582.7
  Top Layer w7: v1(1625.1,2669.43) UD9.5@1694.03,2669.43
  Bottom Layer w7: UT45.11@1189.63,2858.37 1263.27,2858.37 1452.2,2669.43 v1(1625.1,2669.43)
TRAN3_DATA7: UD9.6 UT45.12 | length 586.8
  Top Layer w7: v1(1577.63,2644) 1577.8,2643.83 UD9.6@1694.03,2643.83
  Bottom Layer w7: UT45.12@1189.63,2842.67 1257.97,2842.67 1456.63,2644 v1(1577.63,2644)
TRAN3_DATA8: UD9.7 UT45.13 | length 590.9
  Top Layer w7: v1(1625.1,2618.23) UD9.7@1694.03,2618.23
  Bottom Layer w7: UT45.13@1189.63,2826.97 1252.67,2826.97 1461.4,2618.23 v1(1625.1,2618.23)
TRAN3_DATA9: UD9.8 UT45.14 | length 595
  Top Layer w7: v1(1586.77,2592.63) UD9.8@1694.03,2592.63
  Bottom Layer w7: UT45.14@1189.63,2811.27 1248.37,2811.27 1467,2592.63 v1(1586.77,2592.63)
TRAN3_DATA10: UD9.9 UT45.16 | length 592.6
  Top Layer w7: v1(1625.1,2567.03) UD9.9@1694.03,2567.03
  Bottom Layer w7: UT45.16@1189.63,2779.87 1258.77,2779.87 1471.6,2567.03 v1(1625.1,2567.03)
TRAN3_DATA11: UD9.10 UT45.17 | length 596.7
  Top Layer w7: v1(1586.77,2541.43) UD9.10@1694.03,2541.43
  Bottom Layer w7: UT45.17@1189.63,2764.17 1250.47,2764.17 1473.2,2541.43 v1(1586.77,2541.43)
TRAN3_DATA12: UD9.11 UT45.19 | length 594.3
  Top Layer w7: v1(1625.1,2515.83) UD9.11@1694.03,2515.83
  Bottom Layer w7: UT45.19@1189.63,2732.77 1260.87,2732.77 1477.8,2515.83 v1(1625.1,2515.83)
TRAN3_DATA13: UD9.12 UT45.20 | length 598.4
  Top Layer w7: v1(1586.77,2490.23) UD9.12@1694.03,2490.23
  Bottom Layer w7: UT45.20@1189.63,2717.07 1256.57,2717.07 1483.4,2490.23 v1(1586.77,2490.23)
TRAN3_DATA14: UD9.13 UT45.22 | length 596
  Top Layer w7: v1(1625.1,2464.63) UD9.13@1694.03,2464.63
  Bottom Layer w7: UT45.22@1189.63,2685.67 1266.97,2685.67 1488,2464.63 v1(1625.1,2464.63)
TRAN3_DATA15: UD9.14 UT45.23 | length 600.1
  Top Layer w7: v1(1577.63,2439) UD9.14@1694,2439
  Bottom Layer w7: UT45.23@1189.63,2669.97 1262.67,2669.97 1493.6,2439.03 v1(1577.63,2439)
TRAN4_DATA0: UD13.27 UT60.2 | length 992.4
  Top Layer w7: v1(1627.63,3279.37) 1648.63,3279.37 1659.63,3268.37 1997.27,3268.37 2024.63,3241 2024.63,3218.37 2007.5,3201.23 UD13.27@1969.03,3201.23
  Bottom Layer w7: UT60.2@1188.63,3412.67 1238.97,3412.67 1372.27,3279.37 v1(1627.63,3279.37)
TRAN4_DATA1: UD13.28 UT60.3 | length 858.6
  Top Layer w7: v1(1591.63,3252.37) 1956.63,3252.37 1969.03,3239.97 UD13.28@1969.03,3226.83
  Bottom Layer w7: UT60.3@1188.63,3396.97 1233.67,3396.97 1378.27,3252.37 v1(1591.63,3252.37)
TRAN4_DATA2: UD13.1 UT60.5 | length 567.9
  Top Layer w7: v1(1630.1,3226.83) UD13.1@1699.03,3226.83
  Bottom Layer w7: UT60.5@1188.63,3365.57 1243.07,3365.57 1381.8,3226.83 v1(1630.1,3226.83)
TRAN4_DATA3: UD13.2 UT60.6 | length 572
  Top Layer w7: v1(1591.77,3201.23) UD13.2@1699.03,3201.23
  Bottom Layer w7: UT60.6@1188.63,3349.87 1238.77,3349.87 1387.4,3201.23 v1(1591.77,3201.23)
TRAN4_DATA4: UD13.3 UT60.8 | length 569.6
  Top Layer w7: v1(1630.1,3175.63) UD13.3@1699.03,3175.63
  Bottom Layer w7: UT60.8@1188.63,3318.47 1249.17,3318.47 1392,3175.63 v1(1630.1,3175.63)
TRAN4_DATA5: UD13.4 UT60.9 | length 576.4
  Top Layer w7: v1(1591.77,3150.03) 1699.03,3150.03 UD13.4@1697.03,3148.17
  Bottom Layer w7: UT60.9@1188.63,3302.77 1244.87,3302.77 1397.6,3150.03 v1(1591.77,3150.03)